# EAGLE board infinity_mirror_revd (EAGLE 9.6.2)

Size 160 x 100 mm. Coordinates in mm from the lower left corner, seen from the top.
Outline: 0,0 160,0 160,100 0,100 0,0
Copper layers (1*16): Top 0.035mm / dielectric 1.5mm / Bottom 0.035mm
Design rules "default": minimum track width 6mil, minimum drill 0.35mm, track to track 6mil, track to pad 6mil, pad to pad 6mil, via to via 6mil, smd to smd 6mil, copper to edge 40mil, drill to drill 6mil, minimum pad ring 10mil, minimum via ring 8mil, stop-mask expansion 4mil, vias tented up to drill 0mil, thermal gap 10mil

## Footprints (pad centres in the part's own frame; a part is rotated, then mirrored left to right if it is on the bottom)
0805 = smd 0.8 x 1.2: 1 -0.9,0; 2 0.9,0
LED-1206 = smd 1.2 x 1.4: A -1.5,0; C 1.5,0
POWER_JACK_SMD = smd 2.8 x 2.4: GND 0,-5.7; P$4 6.1,-5.7; VIN0 0,5.7; VIN1 6.1,5.7 | hole 2.032: 0,0; 4.572,0
SOT23-3 = smd 0.8 x 0.9: 1 -0.95,-1; 2 0.95,-1; 3 0,1.1
SOT223 = smd 1.219 x 2.235: 1 -2.311,-3.099; 2 0,-3.099; 3 2.311,-3.099 | smd 3.6 x 2.2: 4 0,3.099
ESP32-MINI-1-N4 = smd 0.8 x 0.4: 1 -5.95,4.8; 2 -5.95,4; 3 -5.95,3.2; 4 -5.95,2.4; 5 -5.95,1.6; 6 -5.95,0.8; 7 -5.95,0; 8 -5.95,-0.8; 9 -5.95,-1.6; 10 -5.95,-2.4; 11 -5.95,-3.2; 12 -5.95,-4; 13 -5.95,-4.8; 28 5.95,-4.8; 29 5.95,-4; 30 5.95,-3.2; 31 5.95,-2.4; 32 5.95,-1.6; 33 5.95,-0.8; 34 5.95,0; 35 5.95,0.8; 36 5.95,1.6; 37 5.95,2.4; 38 5.95,3.2; 39 5.95,4; 40 5.95,4.8 | smd 0.4 x 0.8: 14 -5.2,-6.05; 15 -4.4,-6.05; 16 -3.6,-6.05; 17 -2.8,-6.05; 18 -2,-6.05; 19 -1.2,-6.05; 20 -0.4,-6.05; 21 0.4,-6.05; 22 1.2,-6.05; 23 2,-6.05; 24 2.8,-6.05; 25 3.6,-6.05; 26 4.4,-6.05; 27 5.2,-6.05; 41 5.2,6.05; 42 4.4,6.05; 43 3.6,6.05; 44 2.8,6.05; 45 2,6.05; 46 1.2,6.05; 47 0.4,6.05; 48 -0.4,6.05; 49 -1.2,6.05; 50 -2,6.05; 51 -2.8,6.05; 52 -3.6,6.05; 53 -4.4,6.05; 54 -5.2,6.05 | smd 1 x 1: 55 0,0; P$56 -1.5,0; P$57 1.5,0; P$58 1.5,-1.5; P$59 0,-1.5; P$60 -1.5,-1.5; P$61 1.5,1.5; P$62 0,1.5

## Placement (x,y rotation side)
C1  10uF  [0805]  8.89,10.16 0 top
C2  0.1uF  [0805]  8.89,6.35 0 top
C3  1uF  [0805]  48.26,20.32 0 top
C4  10uF  [0805]  66.04,16.51 180 top
C5  0.1uF  [0805]  81.28,20.32 0 top
C6  0.1uF  [0805]  81.28,17.78 0 top
C7  10uF  [0805]  90.17,10.16 0 top
D1  RED  [LED-1206]  2.54,-26.67 0 top  (outside the outline)
J1  5.5x2.1mm Barrel  [POWER_JACK_SMD]  72.39,3.81 90 top
Q1  800mA/40V  [SOT23-3]  3.81,-7.62 0 top  (outside the outline)
Q2  800mA/40V  [SOT23-3]  3.81,-21.59 0 top  (outside the outline)
R1  10k  [0805]  8.89,12.7 0 top
R2  10k  [0805]  2.54,-12.7 0 top  (outside the outline)
R3  10k  [0805]  2.54,-16.51 0 top  (outside the outline)
R4  10k  [0805]  2.54,-30.48 0 top  (outside the outline)
U1  3.3LDO  [SOT223]  72.39,19.05 270 top
U$1  ESP32-MINI-1-N4  [ESP32-MINI-1-N4]  54.61,7.62 180 top

## Library data of the parts
C1-C7 R1-R4 = _111_IH
D1 = SparkFun-LED; PROD_ID: DIO-09912
J1 = SparkFun-Connectors; PROD_ID: CONN-08106; SF_ID: PRT-12748
Q1 Q2 = SparkFun-DiscreteSemi; PROD_ID: TRANS-08049
U1 = SparkFun-IC-Power; PROD_ID: VREG-08170
U$1 = infinity_mirror_revd

## Nets
DTR: Q2.2 R2.2
ESP_RST: C3.1 Q1.3 R1.1 U$1.8
GND: C1.2 C2.2 C3.2 C4.2 C5.2 C6.2 C7.2 D1.C J1.GND J1.P$4 U1.1 U$1.1 U$1.2 U$1.27 U$1.38 U$1.39 U$1.40 U$1.41 U$1.42 U$1.43 U$1.44 U$1.45 U$1.46 U$1.47 U$1.48 U$1.49 U$1.50 U$1.51 U$1.52 U$1.53 U$1.54 U$1.55
GPIO0: Q2.3 U$1.21
GPIO23: U$1.31
N$1: Q1.1 R2.1
N$2: D1.A R4.1
N$3: Q2.1 R3.1
N$5: U$1.5
N$6: U$1.6
N$7: U$1.7
N$9: U$1.9
N$10: U$1.10
N$11: U$1.11
N$12: U$1.12
N$13: U$1.13
N$17: U$1.29
N$18: U$1.30
N$20: U$1.32
N$21: U$1.33
N$22: U$1.34
N$24: U$1.26
N$25: U$1.25
N$28: U$1.22
N$30: U$1.20
N$31: U$1.19
N$32: U$1.18
N$33: U$1.17
N$34: U$1.16
N$35: U$1.15
N$36: U$1.14
RTS: Q1.2 R3.2
U0RXD: U$1.35
U0TXD: U$1.36
VCC_1: C4.1 C5.1 J1.VIN0 U1.3
VCC_2: C1.1 C2.1 C6.1 C7.1 R1.2 R4.2 U1.2 U1.4 U$1.3

## Tracks (layer width: path | path; a pad name or v marks a point on that pad's centre or on a via)
DTR  (1 unrouted)
ESP_RST  (3 unrouted)
GND  (31 unrouted)
GPIO0  (1 unrouted)
N$1  (1 unrouted)
N$2  (1 unrouted)
N$3  (1 unrouted)
RTS  (1 unrouted)
VCC_1  (3 unrouted)
VCC_2  (8 unrouted)